# EAGLE board PCB_v4 (EAGLE 9.7.0)
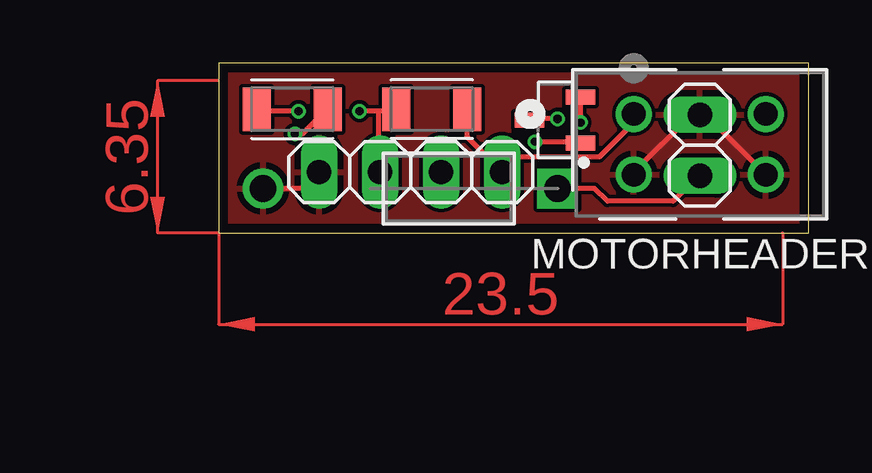
[diagram p0: board, top side]
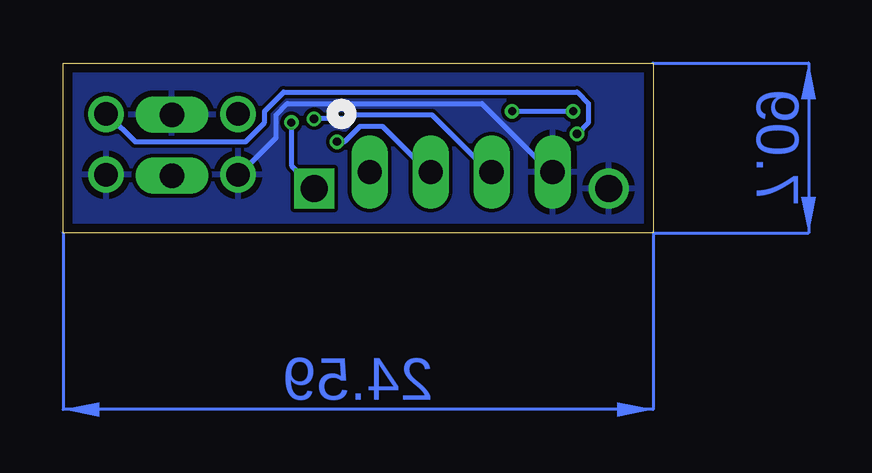
[diagram p1: board, bottom side, seen from below]

Size 24.59 x 7.09 mm. Coordinates in mm from the lower left corner, seen from the top.
Outline: 0,0 24.59,0 24.59,7.09 0,7.09 0,0
Copper layers (1*16): Top 0.035559375mm / dielectric 1.6mm / Bottom 0.035559375mm
Design rules "DRC": minimum track width 6mil, minimum drill 10mil, track to track 6mil, track to pad 6mil, pad to pad 6mil, via to via 6mil, smd to smd 6mil, copper to edge 15mil, drill to drill 6mil, minimum pad ring 5mil, minimum via ring 5mil, stop-mask expansion 2.5mil, vias tented up to drill 0mil, thermal gap 10mil

## Footprints (pad centres in the part's own frame; a part is rotated, then mirrored left to right if it is on the bottom)
DO-41_STM = drill 1.118 pad 1.626 square: 1 1.27,0 | drill 1.118 pad 1.626: 2 13.538,0
1X04 = drill 1.016 long: 1 -3.81,0; 2 -1.27,0; 3 1.27,0; 4 3.81,0
1X02 = drill 1.016 long: 1 -1.27,0; 2 1.27,0
RESC3216X70 = smd 1.165 x 1.815: 1 -1.475,0; 2 1.475,0
SOT95P237X112-3N = smd 1.224 x 0.625: 1 -1.064,0.95; 2 -1.064,-0.95; 3 1.064,0
TCRT5000_VIS = drill 0.991 pad 1.499: 1 0,0; 2 0,-2.54; 3 5.5,0; 4 5.5,-2.54

## Placement (x,y rotation side)
CR1  1N5819DO-41_STM  [DO-41_STM]  15.39,1.85 180 top
HEADERS  PINHD-1X4  [1X04]  8,2.54 0 top
MOTORHEADER  PINHD-1X2  [1X02]  20.06,3.66 90 top
R1  100  [RESC3216X70]  3.07,5.16 180 top
R2  10K  [RESC3216X70]  8.89,5.16 0 top
TRANSISTOR  BC846A  [SOT95P237X112-3N]  14.02,4.71 180 top
U2  TCRT5000TCRT5000_VIS  [TCRT5000_VIS]  17.3,4.97 0 top

## Library data of the parts
CR1 = 1N5819Shortened; COPYRIGHT: Copyright (C) 2024 Ultra Librarian. All rights reserved.; MANUFACTURER_PART_NUMBER: 1N5819; MFR_NAME: STMicroelectronics
HEADERS = Connector; CATEGORY: Headers; DESCRIPTION: Header, Straight, 4 Position; MANUFACTURER: Generic; MPN: Generic; OPERATING_TEMPERATURE: Generic; PART_STATUS: Active; PITCH: 0.100" (2.54mm); ROHS_COMPLIANCE: Generic; SERIES: Generic; SUB-CATEGORY: Headers, Male Pins; TYPE: Board to Board or Cable, Unshrouded, Through Hole, Straight
MOTORHEADER = Connector; CATEGORY: Headers; DESCRIPTION: Header, Straight, 2 Position; MANUFACTURER: Generic; MPN: Generic; OPERATING_TEMPERATURE: Generic; PART_STATUS: Active; PITCH: 0.100" (2.54mm); ROHS_COMPLIANCE: Generic; SERIES: Generic; SUB-CATEGORY: Headers, Male Pins; TYPE: Board to Board or Cable, Unshrouded, Through Hole, Straight
R1 R2 = Resistor; CATEGORY: Resistor; SUB-CATEGORY: Fixed
TRANSISTOR = Transistor; CATEGORY: Transistor; DESCRIPTION: TRANS NPN 65V 0.1A SOT23; MANUFACTURER: Nexperia USA Inc.; SUB-CATEGORY: BJT; TYPE: NPN
U2 = TCRT5000Custom; COPYRIGHT: Copyright (C) 2024 Ultra Librarian. All rights reserved.; MANUFACTURER_PART_NUMBER: TCRT5000; MFR_NAME: Vishay

## Nets
GND: CR1.2 HEADERS.1 MOTORHEADER.2 U2.2 U2.4
IR: HEADERS.4 R2.2 U2.1
MOTOR: HEADERS.3 TRANSISTOR.1
N$3: CR1.1 MOTORHEADER.1 TRANSISTOR.2
N$5: R1.1 U2.3
VCC: HEADERS.2 R1.2 R2.1 TRANSISTOR.3

## Tracks (layer width: path | path; a pad name or v marks a point on that pad's centre or on a via)
GND
  Top 0.203: HEADERS.1 4.13,2.54 3.44,1.85 CR1.2 | U2.2 17.3,2.54 19.68,4.92 20,4.92 MOTORHEADER.2 20.16,4.92 20.32,4.92 22.7,2.54 U2.4
  Bottom 0.203: HEADERS.1 4.29,2.54 7.14,5.4 15.24,5.4 15.72,4.92 15.72,3.97 17.14,2.54 U2.2
  pour Top: 0.23,0.23 24.41,0.23 24.41,6.88 0.23,6.88
  pour Bottom: 0.23,0.23 24.41,0.23 24.41,6.88 0.23,6.88
IR
  Top 0.203: U2.1 17.3,4.6 15.88,3.17 12.45,3.17 HEADERS.4 10.36,3.99 R2.2
MOTOR  (via drill 0.35)
  Top 0.203: v13.18,3.81 14.92,3.81 TRANSISTOR.1
  Bottom 0.203: v13.18,3.81 12.86,3.81 12.22,4.45 11.27,4.45 9.37,2.54 HEADERS.3
N$3  (via drill 0.35)
  Top 0.203: v15.08,4.6 15.08,5.56 TRANSISTOR.2 | MOTORHEADER.1 20,2.38 18.94,1.32 16.2,1.32 15.66,1.85 CR1.1
  Bottom 0.203: v15.08,4.6 15.08,2.81 CR1.1
N$5  (via drill 0.35)
  Top 0.203: v3.17,4.13 3.49,4.13 4.45,5.08 R1.1
  Bottom 0.203: v3.17,4.13 2.7,4.6 2.7,5.4 3.17,5.87 15.4,5.87 16.19,5.08 16.19,4.6 16.99,3.81 21.59,3.81 22.7,4.92 U2.3
VCC  (via drill 0.35)
  Top 0.203: v3.33,5.08 1.75,5.08 R1.2 | 6.67,5.08 7.3,5.08 R2.1 | 6.67,5.08 v5.87,5.08 | v14.13,4.76 13.02,4.76 TRANSISTOR.3 | 6.67,5.08 6.67,2.54 HEADERS.2
  Bottom 0.203: v5.87,5.08 v3.33,5.08 | v14.13,4.76 12.54,4.76 12.38,4.92 9.21,4.92 6.83,2.54 HEADERS.2
(copper drawn outside any net)
  shapes: Bottom area x2, Top area x3